# EAGLE board board (EAGLE 7.7.0)
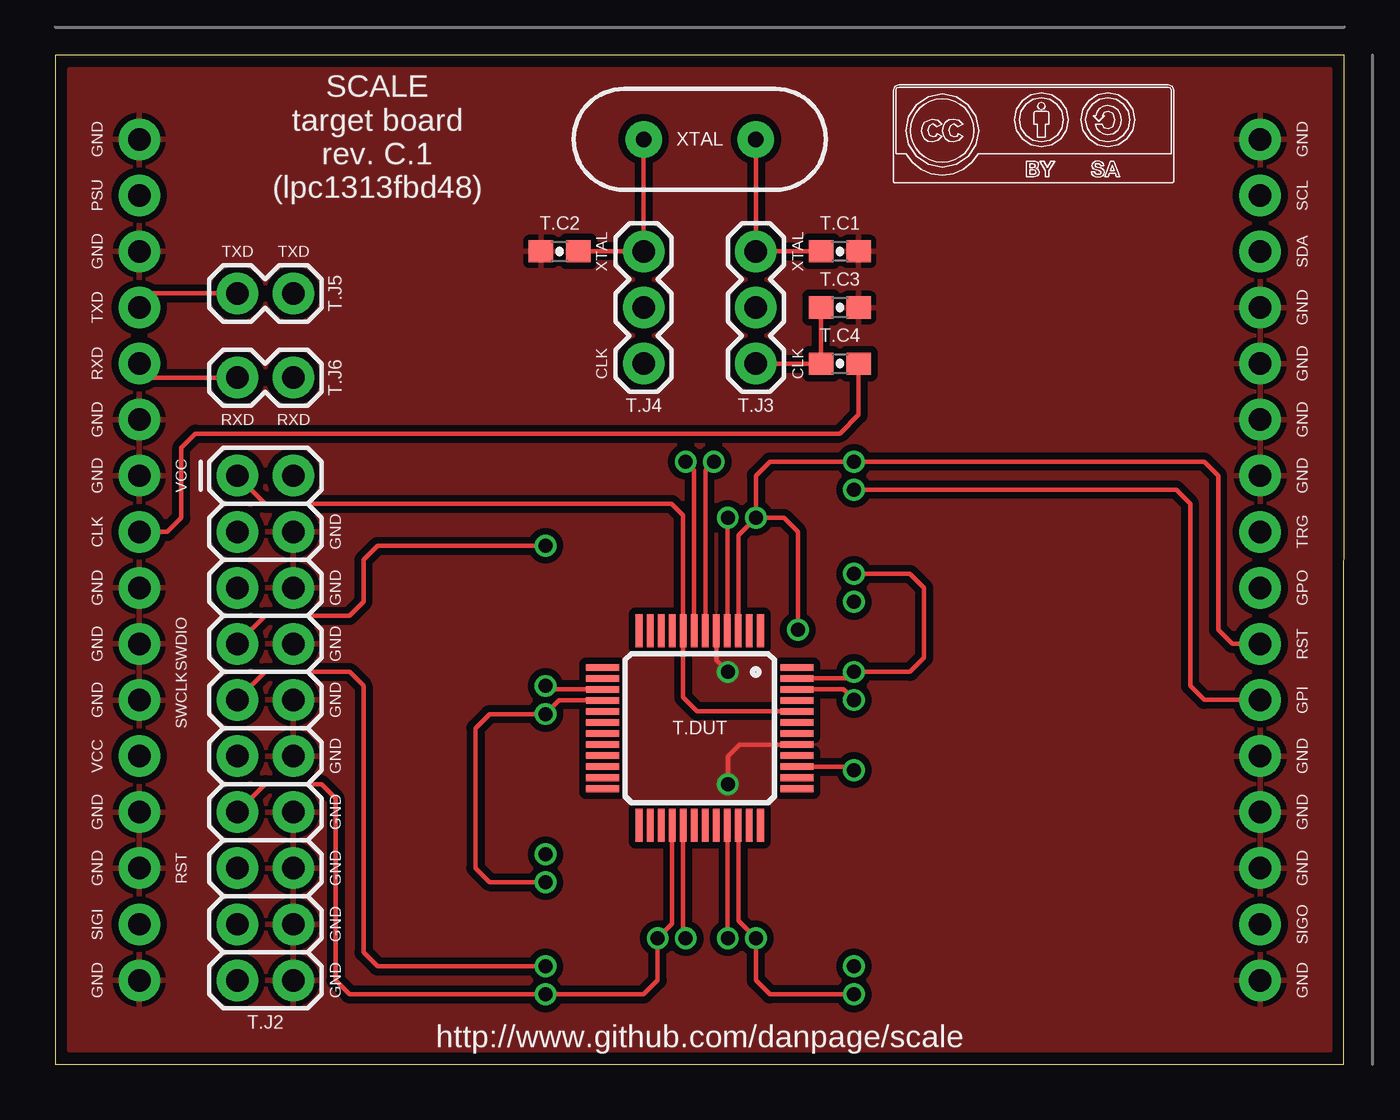
[diagram p0: board, top side]
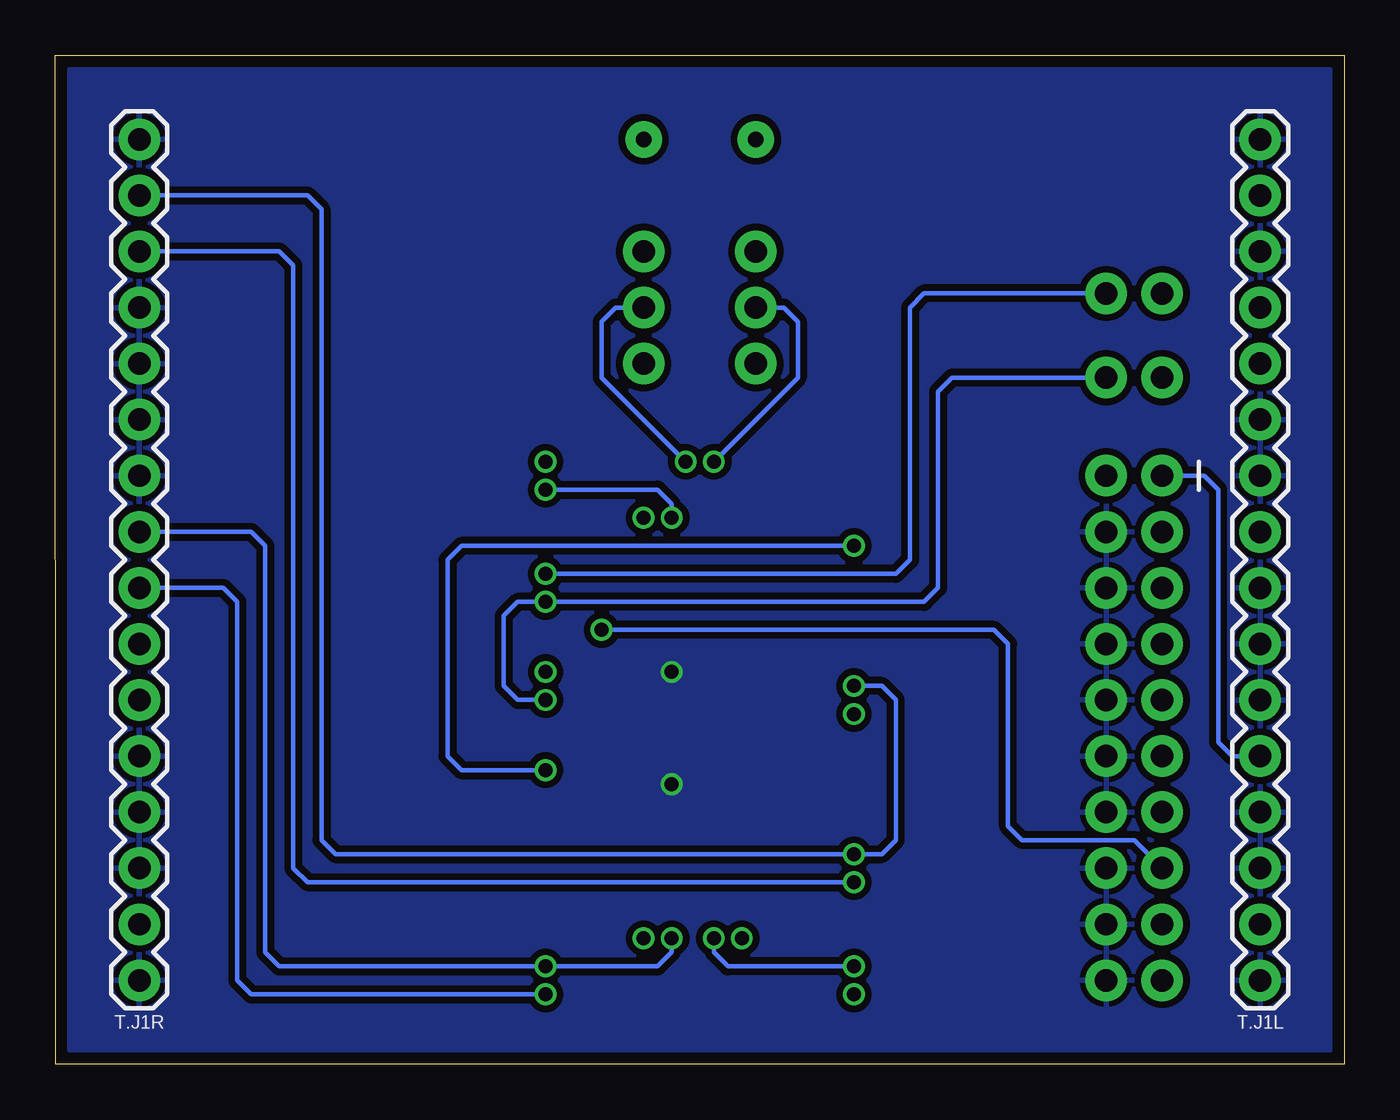
[diagram p1: board, bottom side, seen from below]

Size 58.42 x 45.72 mm. Coordinates in mm from the lower left corner, seen from the top.
Outline: 0,0 58.4,0 58.42,45.72 0,45.72 0,0
Copper layers (1*16): Top 0.0356mm / dielectric 1.5011mm / Bottom 0.0356mm
Design rules "oshpark-2layer": minimum track width 6mil, minimum drill 13mil, track to track 6mil, track to pad 6mil, pad to pad 6mil, via to via 6mil, smd to smd 6mil, copper to edge 15mil, drill to drill 6mil, minimum pad ring 7mil, minimum via ring 7mil, stop-mask expansion 2.5mil, vias tented up to drill 0mil, thermal gap 10mil

## Footprints (pad centres in the part's own frame; a part is rotated, then mirrored left to right if it is on the bottom)
0603-CAP = smd 1.1 x 1: 1 -0.85,0; 2 0.85,0
LQFP48 = smd 1.5 x 0.3: 1 -4.4,2.75; 2 -4.4,2.25; 3 -4.4,1.75; 4 -4.4,1.25; 5 -4.4,0.75; 6 -4.4,0.25; 7 -4.4,-0.25; 8 -4.4,-0.75; 9 -4.4,-1.25; 10 -4.4,-1.75; 11 -4.4,-2.25; 12 -4.4,-2.75; 25 4.4,-2.75; 26 4.4,-2.25; 27 4.4,-1.75; 28 4.4,-1.25; 29 4.4,-0.75; 30 4.4,-0.25; 31 4.4,0.25; 32 4.4,0.75; 33 4.4,1.25; 34 4.4,1.75; 35 4.4,2.25; 36 4.4,2.75 | smd 0.3 x 1.5: 13 -2.75,-4.4; 14 -2.25,-4.4; 15 -1.75,-4.4; 16 -1.25,-4.4; 17 -0.75,-4.4; 18 -0.25,-4.4; 19 0.25,-4.4; 20 0.75,-4.4; 21 1.25,-4.4; 22 1.75,-4.4; 23 2.25,-4.4; 24 2.75,-4.4; 37 2.75,4.4; 38 2.25,4.4; 39 1.75,4.4; 40 1.25,4.4; 41 0.75,4.4; 42 0.25,4.4; 43 -0.25,4.4; 44 -0.75,4.4; 45 -1.25,4.4; 46 -1.75,4.4; 47 -2.25,4.4; 48 -2.75,4.4
1X16 = drill 1.016 pad 1.88: 1 0,0; 2 2.54,0; 3 5.08,0; 4 7.62,0; 5 10.16,0; 6 12.7,0; 7 15.24,0; 8 17.78,0; 9 20.32,0; 10 22.86,0; 11 25.4,0; 12 27.94,0; 13 30.48,0; 14 33.02,0; 15 35.56,0; 16 38.1,0
2X10 = drill 1.016 pad 1.88: 1 0,0; 2 0,2.54; 3 2.54,0; 4 2.54,2.54; 5 5.08,0; 6 5.08,2.54; 7 7.62,0; 8 7.62,2.54; 9 10.16,0; 10 10.16,2.54; 11 12.7,0; 12 12.7,2.54; 13 15.24,0; 14 15.24,2.54; 15 17.78,0; 16 17.78,2.54; 17 20.32,0; 18 20.32,2.54; 19 22.86,0; 20 22.86,2.54
1X03 = drill 1.016 pad 1.88: 1 0,0; 2 2.54,0; 3 5.08,0
1X02 = drill 1.016 pad 1.88: 1 0,0; 2 2.54,0
HC49US = drill 0.7 pad 1.651: 1 -2.54,0; 2 2.54,0

## Placement (x,y rotation side)
T.C1  0.018 nF = 18 pF  [0603-CAP]  35.56,36.83 180 top
T.C2  0.018 nF = 18 pF  [0603-CAP]  22.86,36.83 0 top
T.C3  0.3 nF = 300 pF  [0603-CAP]  35.56,34.29 180 top
T.C4  0.1 nF = 100 pF  [0603-CAP]  35.56,31.75 0 top
T.DUT  LPC1313FBD48  [LQFP48]  29.21,15.24 270 top
T.J1L  [1X16]  3.81,3.81 90 bottom
T.J1R  [1X16]  54.61,3.81 90 bottom
T.J2  [2X10]  8.26,26.67 270 top
T.J3  [1X03]  31.75,36.83 270 top
T.J4  [1X03]  26.67,36.83 270 top
T.J5  [1X02]  8.26,34.92 0 top
T.J6  [1X02]  8.26,31.11 0 top
XTAL  16 Mhz  [HC49US]  29.21,41.91 0 top

## Library data of the parts
T.C1-T.C4 = SparkFun-Capacitors
T.DUT = board
T.J1L T.J1R T.J2-T.J6 = SparkFun-Connectors
XTAL = SparkFun-FreqCtrl

## Nets
DUT_CLK: T.C4.2 T.J1L.9
DUT_GPI: T.DUT.4 T.J1R.6
DUT_GPO: T.DUT.34 T.J1R.8
DUT_RST: T.DUT.3 T.J1R.7 T.J2.15
DUT_RXD: T.J1L.12 T.J6.1
DUT_SCL: T.DUT.15 T.J1R.15
DUT_SDA: T.DUT.16 T.J1R.14
DUT_SIGI: T.J1L.2
DUT_SIGO: T.J1R.2
DUT_SWCLK: T.DUT.29 T.J2.9
DUT_SWDIO: T.DUT.39 T.J2.7
DUT_SWO: T.DUT.28 T.J2.13
DUT_TRG: T.DUT.33 T.J1R.9
DUT_TXD: T.J1L.13 T.J5.1
DUT_VCC: T.DUT.8 T.DUT.44 T.J1L.5 T.J2.1
DUT_XTAL1: T.DUT.6 T.J3.2
DUT_XTAL2: T.DUT.7 T.J4.2
GND: T.C1.1 T.C2.1 T.C3.1 T.DUT.5 T.DUT.41 T.J1L.1 T.J1L.3 T.J1L.4 T.J1L.6 T.J1L.7 T.J1L.8 T.J1L.10 T.J1L.11 T.J1L.14 T.J1L.16 T.J1R.1 T.J1R.3 T.J1R.4 T.J1R.5 T.J1R.10 T.J1R.11 T.J1R.12 T.J1R.13 T.J1R.16 T.J2.4 T.J2.6 T.J2.8 T.J2.10 T.J2.12 T.J2.14 T.J2.16 T.J2.18 T.J2.20
N$1: T.C1.2 T.J3.1 XTAL.2
N$2: T.C2.2 T.J4.1 XTAL.1
N$3: T.DUT.47 T.J5.2
N$4: T.DUT.46 T.J6.2
N$20: T.C3.2 T.C4.1 T.J3.3
PSU: T.J1L.15

## Tracks (layer width: path | path; a pad name or v marks a point on that pad's centre or on a via)
DUT_CLK
  Top 0.203: T.J1L.9 5.08,24.13 5.71,24.77 5.71,27.94 6.35,28.57 35.56,28.57 36.41,29.43 T.C4.2
DUT_GPI  (via drill 0.64)
  Top 0.203: T.J1R.6 52.07,16.51 51.44,17.14 51.44,25.4 50.8,26.04 v36.2,26.04 | T.DUT.4 30.46,24.75 v30.48,24.77
  Bottom 0.203: v36.2,26.04 31.11,26.04 30.48,25.4 v30.48,24.77
DUT_GPO  (via drill 0.64)
  Top 0.203: v36.2,3.17 32.38,3.17 31.75,3.81 v31.75,5.71 30.96,6.5 T.DUT.34
  Bottom 0.203: T.J1R.8 50.8,21.59 50.16,20.95 50.16,3.81 49.53,3.17 v36.2,3.17
DUT_RST  (via drill 0.64)
  Top 0.203: T.J1R.7 53.34,19.05 52.7,19.68 52.7,26.67 52.07,27.3 v36.2,27.3 32.38,27.3 31.75,26.67 v31.75,24.77 | T.DUT.3 30.96,23.98 v31.75,24.77 | v33.66,19.68 33.66,24.13 33.02,24.77 v31.75,24.77
  Bottom 0.203: T.J2.15 9.53,10.16 14.61,10.16 15.24,10.79 15.24,19.05 15.88,19.68 v33.66,19.68
DUT_RXD
  Top 0.203: T.J1L.12 4.45,31.11 T.J6.1
DUT_SCL  (via drill 0.64)
  Top 0.203: T.DUT.15 22.38,16.99 v22.23,17.14
  Bottom 0.203: T.J1R.15 46.99,39.37 46.35,38.73 46.35,10.16 45.72,9.53 v22.23,9.53 20.95,9.53 20.32,10.16 20.32,16.51 20.95,17.14 v22.23,17.14
DUT_SDA  (via drill 0.64)
  Top 0.203: v22.23,8.26 19.68,8.26 19.05,8.89 19.05,15.24 19.68,15.88 v22.23,15.88 22.84,16.49 T.DUT.16
  Bottom 0.203: T.J1R.14 48.26,36.83 47.62,36.2 47.62,8.89 46.99,8.26 v22.23,8.26
DUT_SWCLK  (via drill 0.64)
  Top 0.203: T.J2.9 9.53,17.78 13.34,17.78 13.97,17.14 13.97,5.08 14.61,4.45 v22.23,4.45 | T.DUT.29 28.46,5.83 v28.57,5.71
  Bottom 0.203: v22.23,4.45 27.94,4.45 28.57,5.08 v28.57,5.71
DUT_SWDIO  (via drill 0.64)
  Top 0.203: T.J2.7 9.53,20.32 13.34,20.32 13.97,20.95 13.97,22.86 14.61,23.5 v22.23,23.5 | T.DUT.39 36.04,13.49 v36.2,13.34
  Bottom 0.203: v22.23,23.5 40.01,23.5 40.64,22.86 40.64,13.97 40.01,13.34 v36.2,13.34
DUT_SWO  (via drill 0.64)
  Top 0.203: T.J2.13 9.53,12.7 12.06,12.7 12.7,12.06 12.7,3.81 13.34,3.17 v22.23,3.17 26.67,3.17 27.3,3.81 v27.3,5.71 27.96,6.37 T.DUT.28
DUT_TRG  (via drill 0.64)
  Top 0.203: T.DUT.33 30.46,5.74 v30.48,5.71
  Bottom 0.203: T.J1R.9 49.53,24.13 48.9,23.5 48.9,5.08 48.26,4.45 v36.2,4.45 31.11,4.45 30.48,5.08 v30.48,5.71
DUT_TXD
  Top 0.203: T.J1L.13 4.45,34.92 T.J5.1
DUT_VCC
  Top 0.203: T.J2.1 9.53,25.4 27.94,25.4 28.46,24.88 T.DUT.8 28.46,16.62 29.09,15.99 T.DUT.44
  Bottom 0.203: T.J1L.5 5.08,13.97 5.71,14.61 5.71,26.04 6.35,26.67 T.J2.1
DUT_XTAL1  (via drill 0.64)
  Top 0.203: T.DUT.6 29.46,26.92 v29.84,27.3
  Bottom 0.203: T.J3.2 33.02,34.29 33.66,33.66 33.66,31.11 v29.84,27.3
DUT_XTAL2  (via drill 0.64)
  Top 0.203: T.DUT.7 28.96,26.92 v28.57,27.3
  Bottom 0.203: T.J4.2 25.4,34.29 24.77,33.66 24.77,31.11 v28.57,27.3
GND  (via drill 0.64)
  Top 0.203: T.DUT.5 29.96,18.3 v30.48,17.78 | T.DUT.41 31,14.49 30.48,13.97 v30.48,12.7
  pour Bottom (isolate 0.305): 0.64,0.64 0.64,45.09 57.78,45.09 57.78,0.64
  pour Top (isolate 0.305): 0.64,0.64 0.64,45.09 57.78,45.09 57.78,0.64
N$1
  Top 0.203: XTAL.2 T.J3.1 T.C1.2
N$2
  Top 0.203: XTAL.1 T.J4.1 T.C2.2
N$3  (via drill 0.64)
  Top 0.203: v36.2,22.23 38.73,22.23 39.37,21.59 39.37,18.41 38.73,17.78 v36.2,17.78 35.91,17.49 T.DUT.47
  Bottom 0.203: T.J5.2 19.05,34.92 19.68,34.29 19.68,22.86 20.32,22.23 v36.2,22.23
N$4  (via drill 0.64)
  Top 0.203: T.DUT.46 35.72,16.99 v36.2,16.51
  Bottom 0.203: T.J6.2 17.78,31.11 18.41,30.48 18.41,21.59 19.05,20.95 v36.2,20.95 37.47,20.95 38.1,20.32 38.1,17.14 37.47,16.51 v36.2,16.51
N$20
  Top 0.203: T.J3.3 T.C4.1 T.C3.2

## Text on the board
tPlace: GND | GND | SCALE / target board / rev. C.1 / (lpc1313fbd48) | PSU | SCL | GND | TXD | TXD | XTAL | XTAL | SDA | TXD | GND | RXD | CLK | CLK | GND | GND | RXD | RXD | GND | GND | VCC | GND | CLK | GND | TRG | GND | GND | GPO | GND | SWDIO | GND | RST | GND | SWCLK | GND | GPI | VCC | GND | GND | GND | GND | GND | GND | RST | GND | GND | SIGI | GND | SIGO | GND | GND | GND | http://www.github.com/danpage/scale